# Altium PCB ADC.PcbDoc
Units mm, origin at the board's own origin, x right, y up, seen from the top; angles counter-clockwise.
Board outline 152.4 x 101.6 mm, 20 copper layers (F.Cu, F.Mask, B.Cu, B.Mask, In1.Cu, F.SilkS, In2.Cu, B.SilkS, F.Adhes, B.Adhes, F.Paste, B.Paste, Dwgs.User, Cmts.User, Eco1.User, Eco2.User, Edge.Cuts, Margin, B.CrtYd, F.CrtYd); 28 components, 48 nets, 160 pads, 53 vias.
Unrouted connection lines stored in the file: 40.
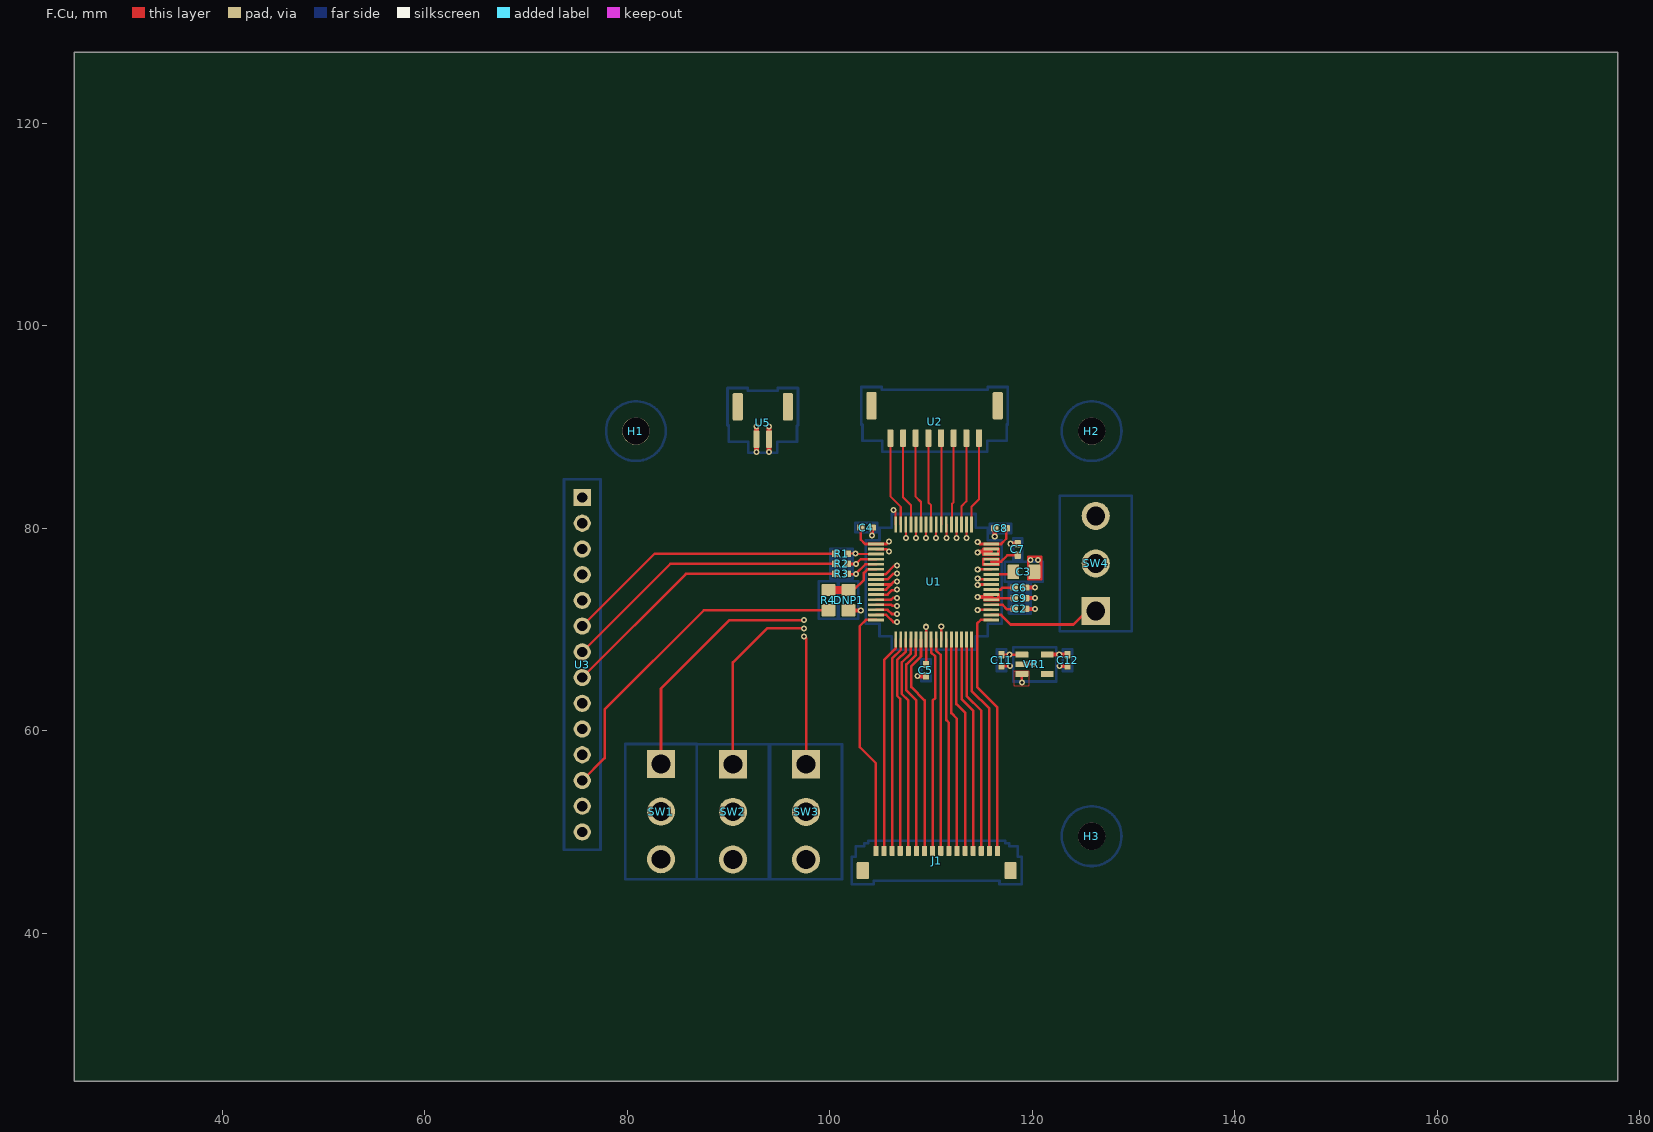
[diagram p0: F.Cu view]
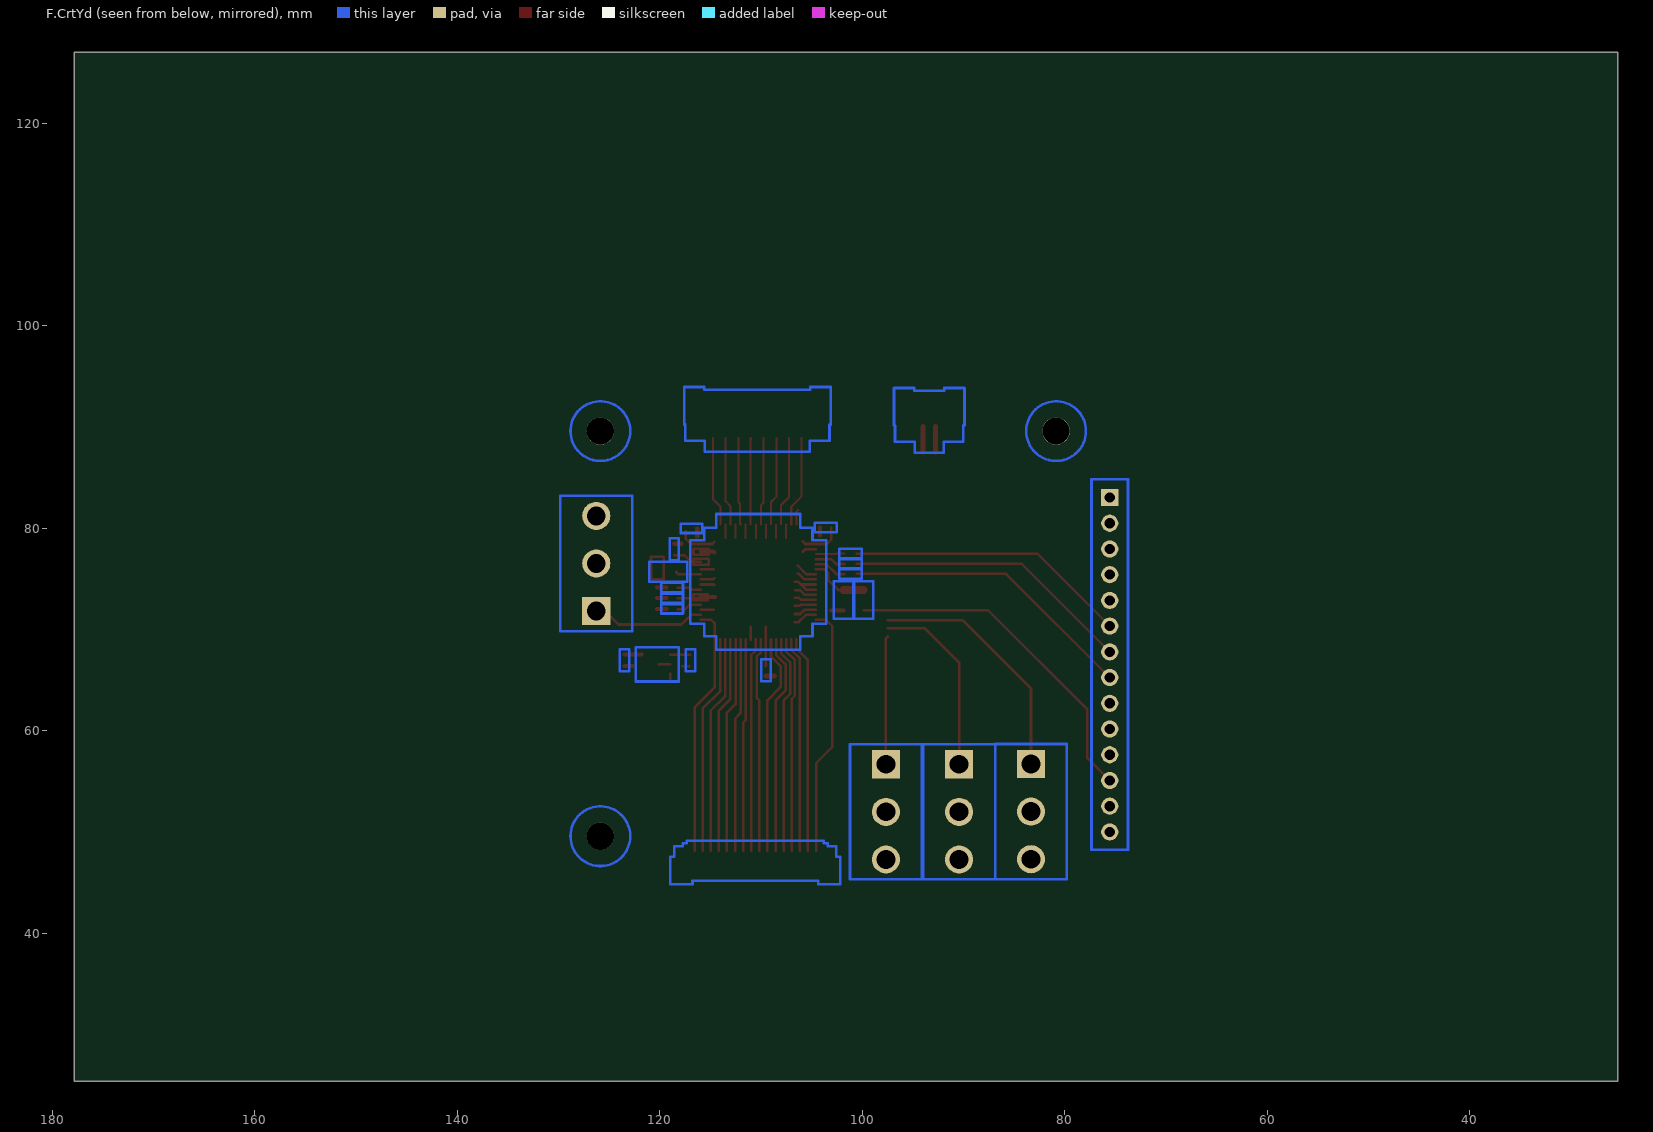
[diagram p1: F.CrtYd view, seen from below]
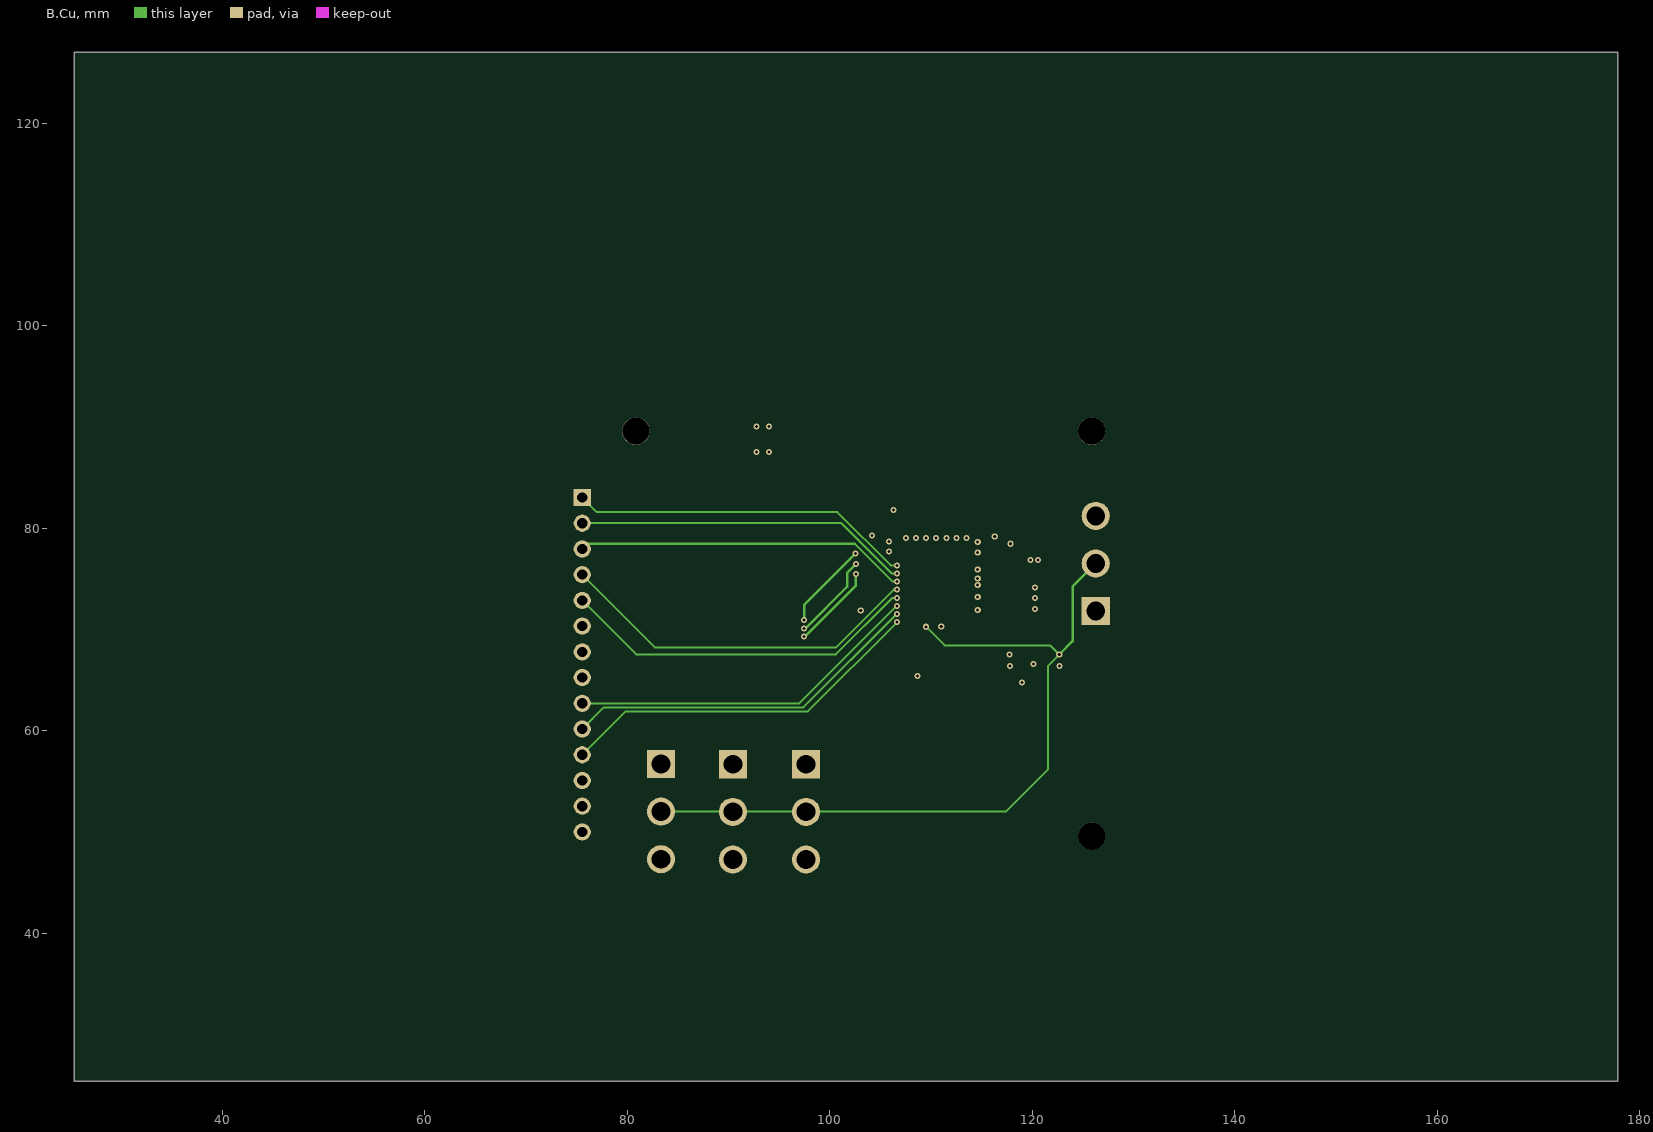
[diagram p2: B.Cu]
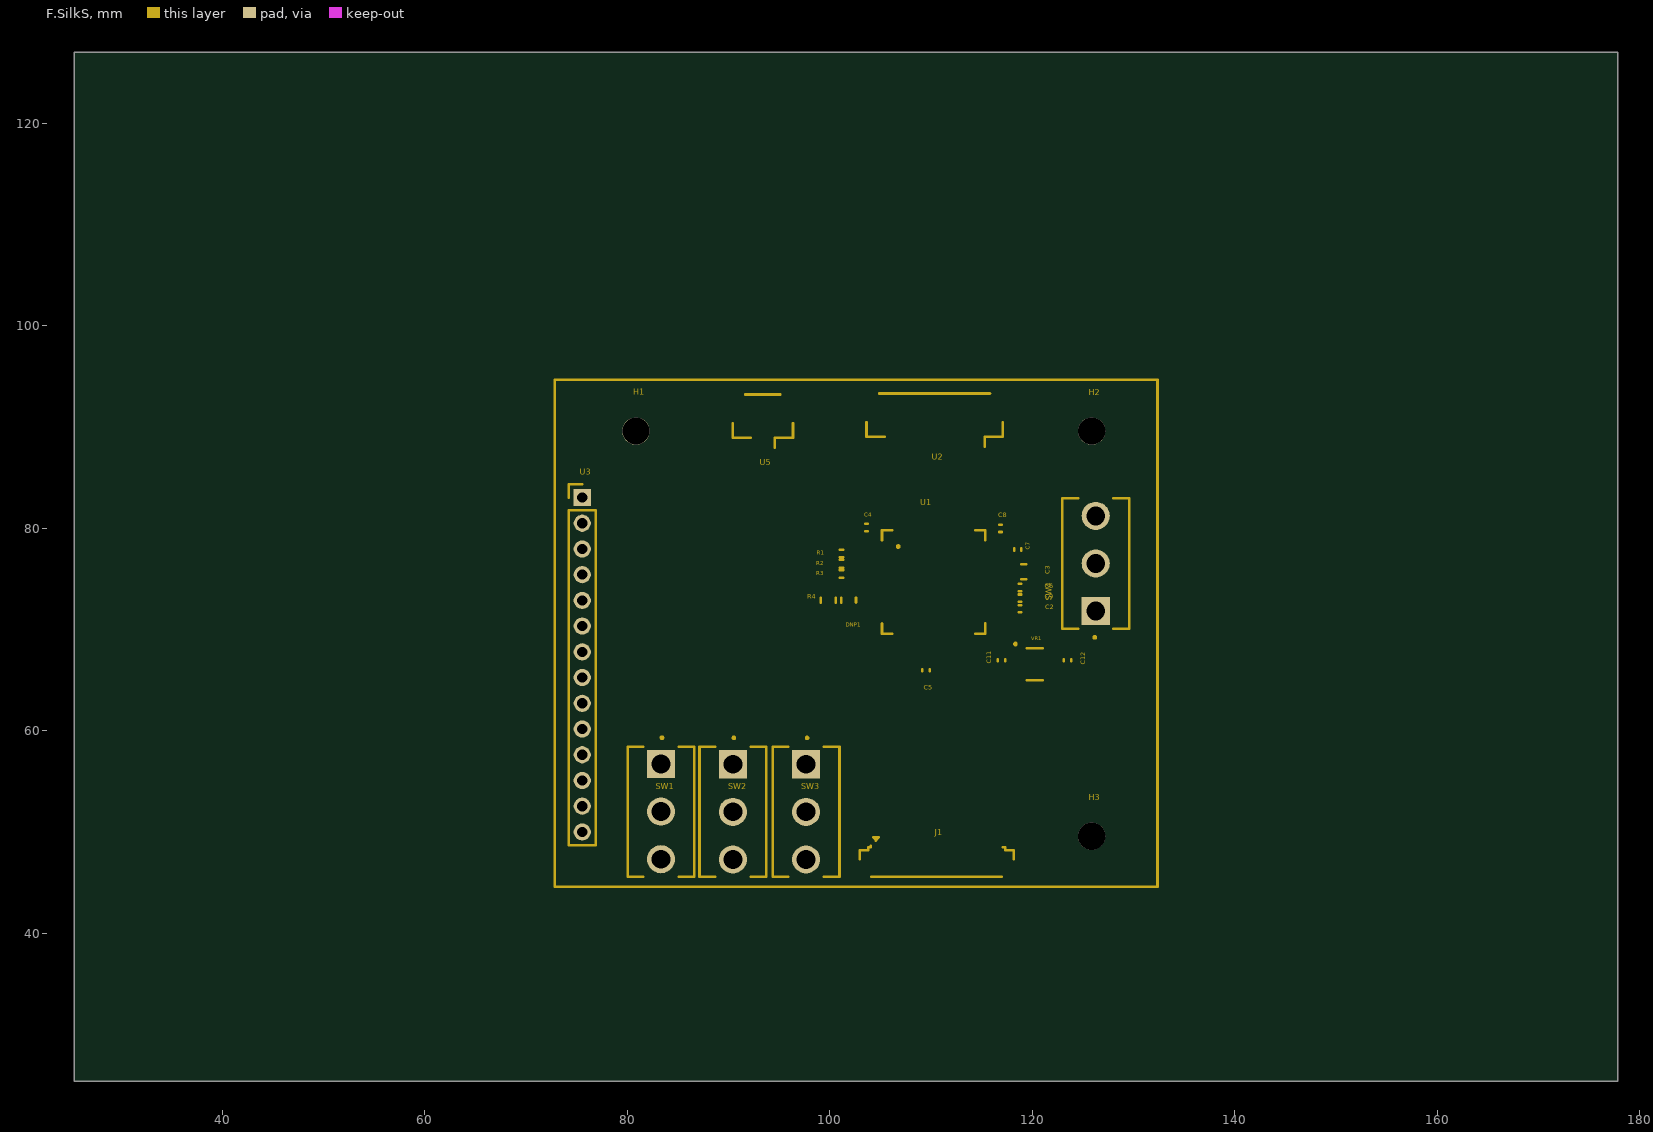
[diagram p3: F.SilkS]
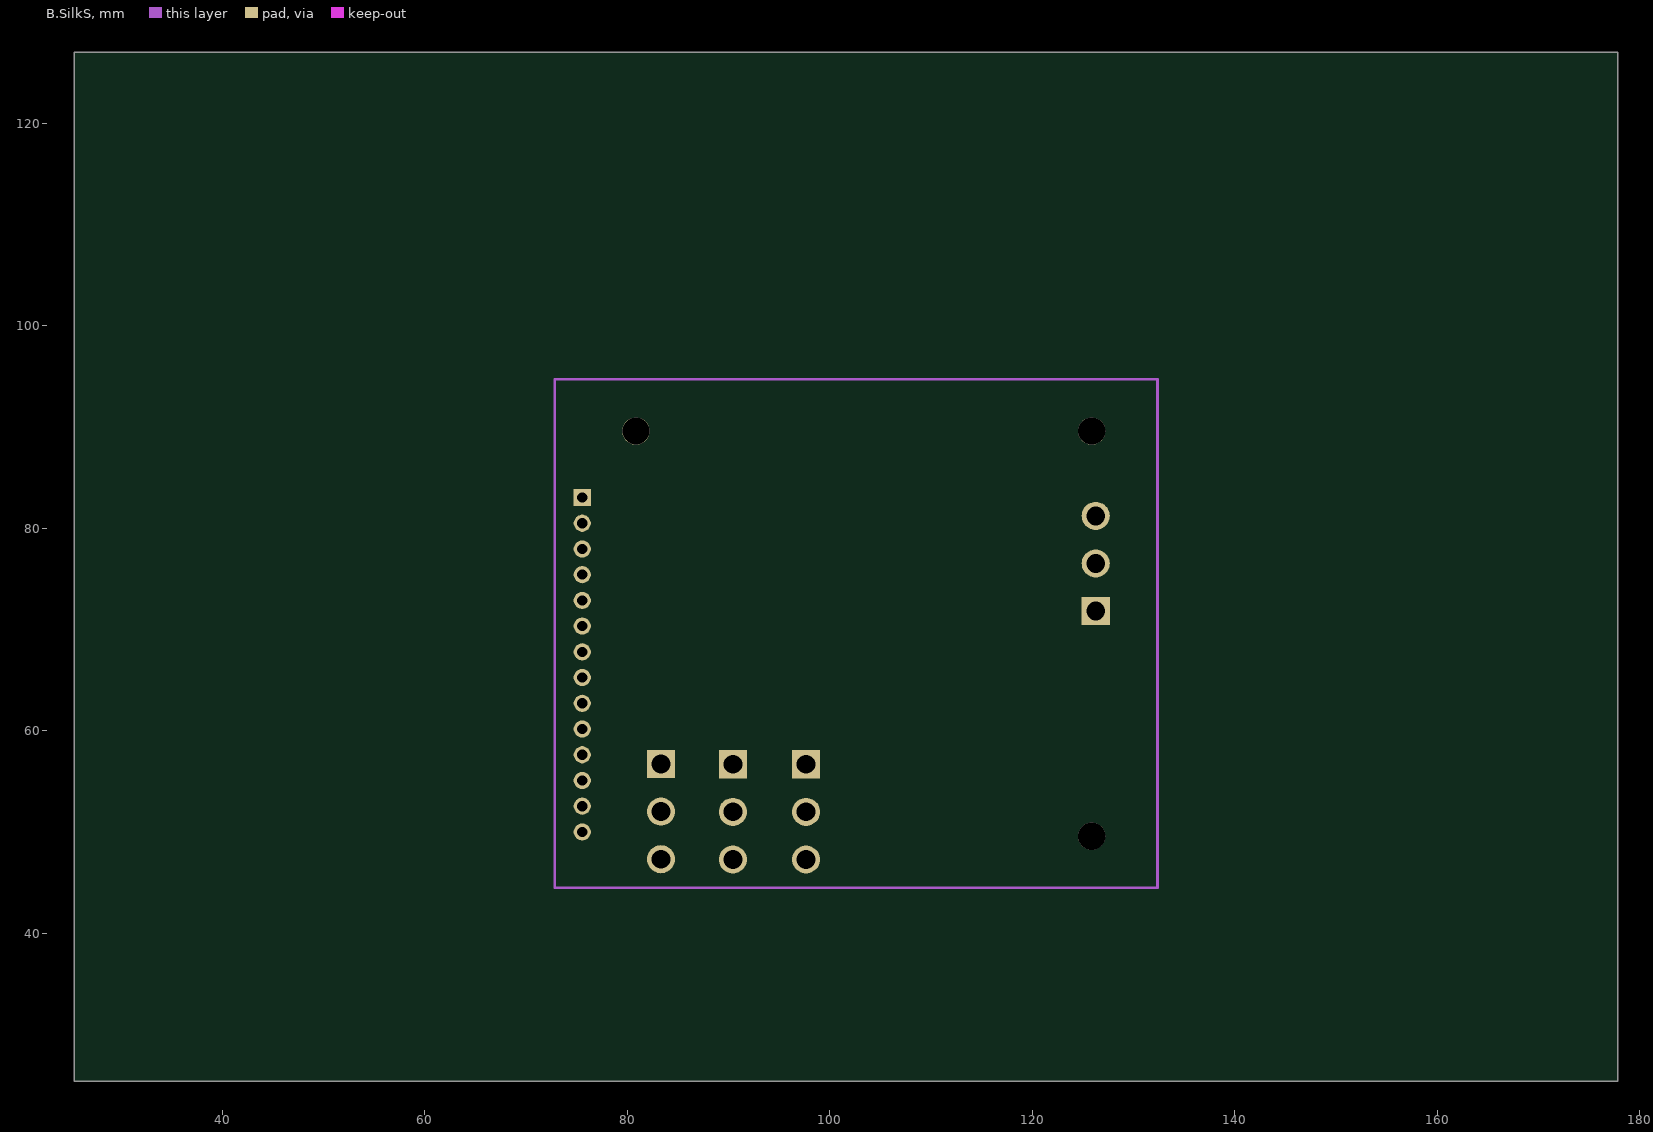
[diagram p4: B.SilkS]
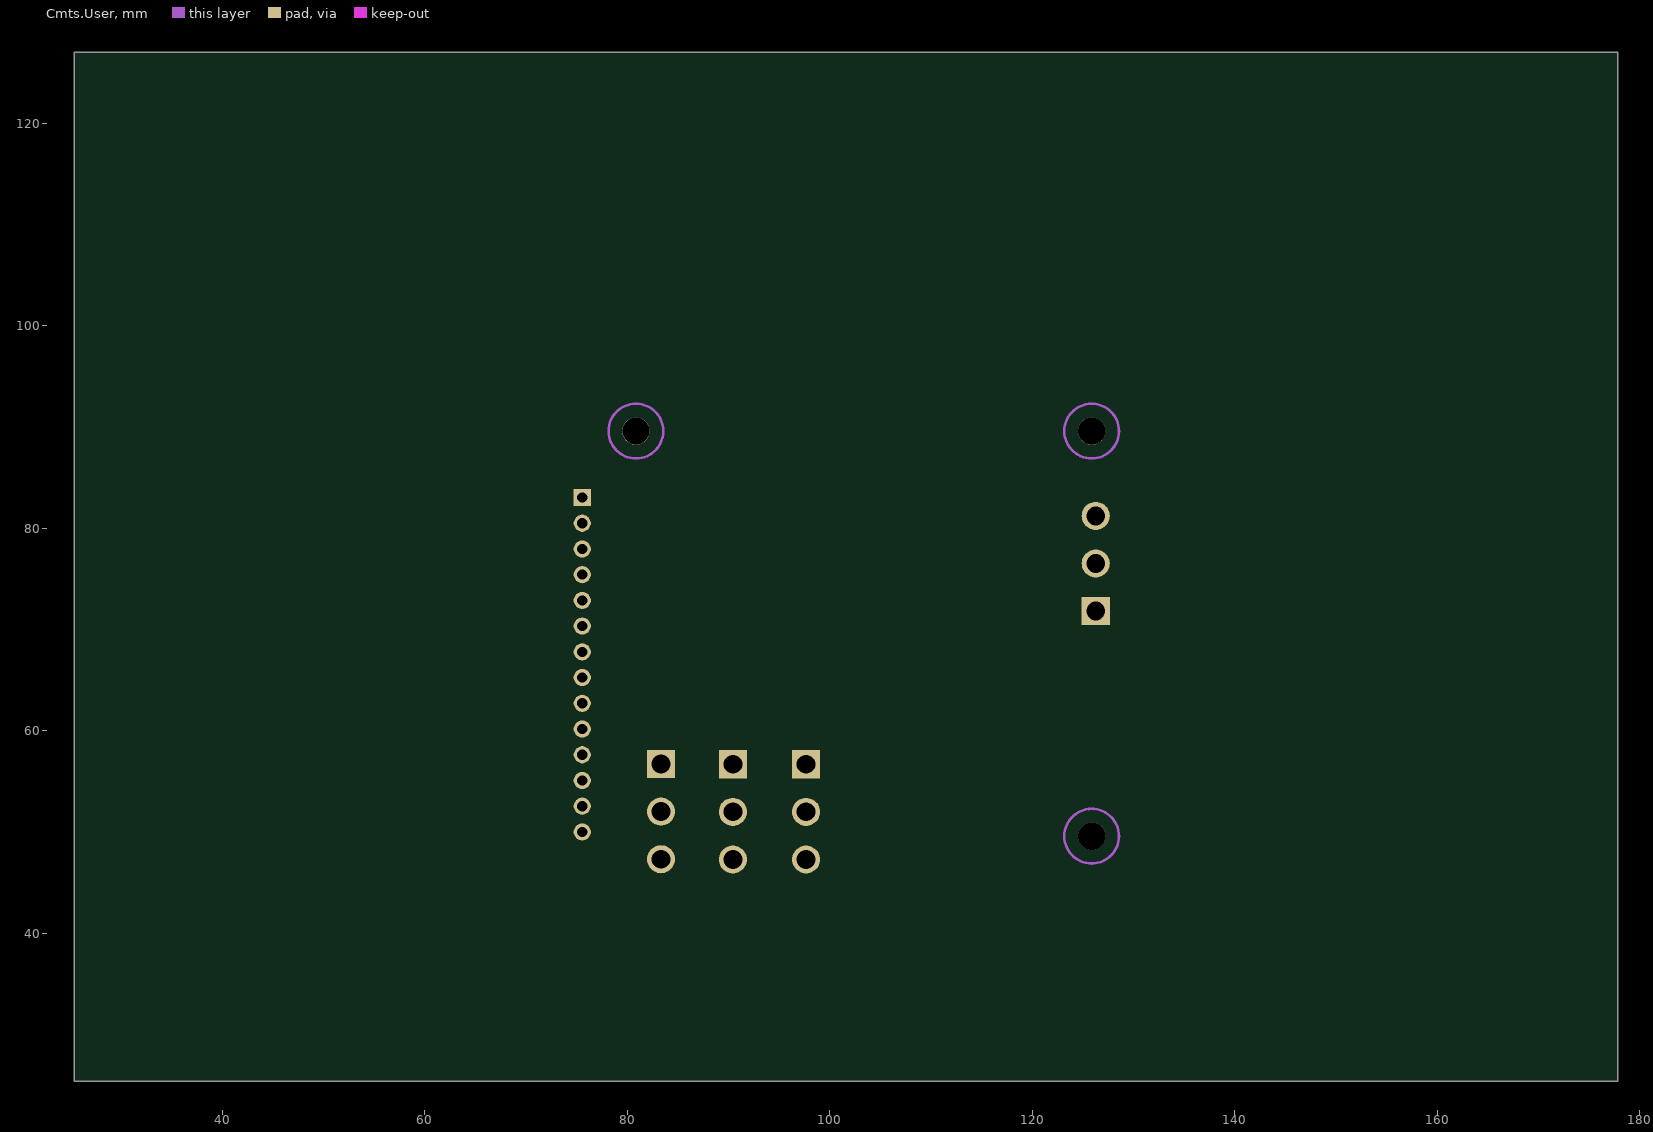
[diagram p5: Cmts.User]
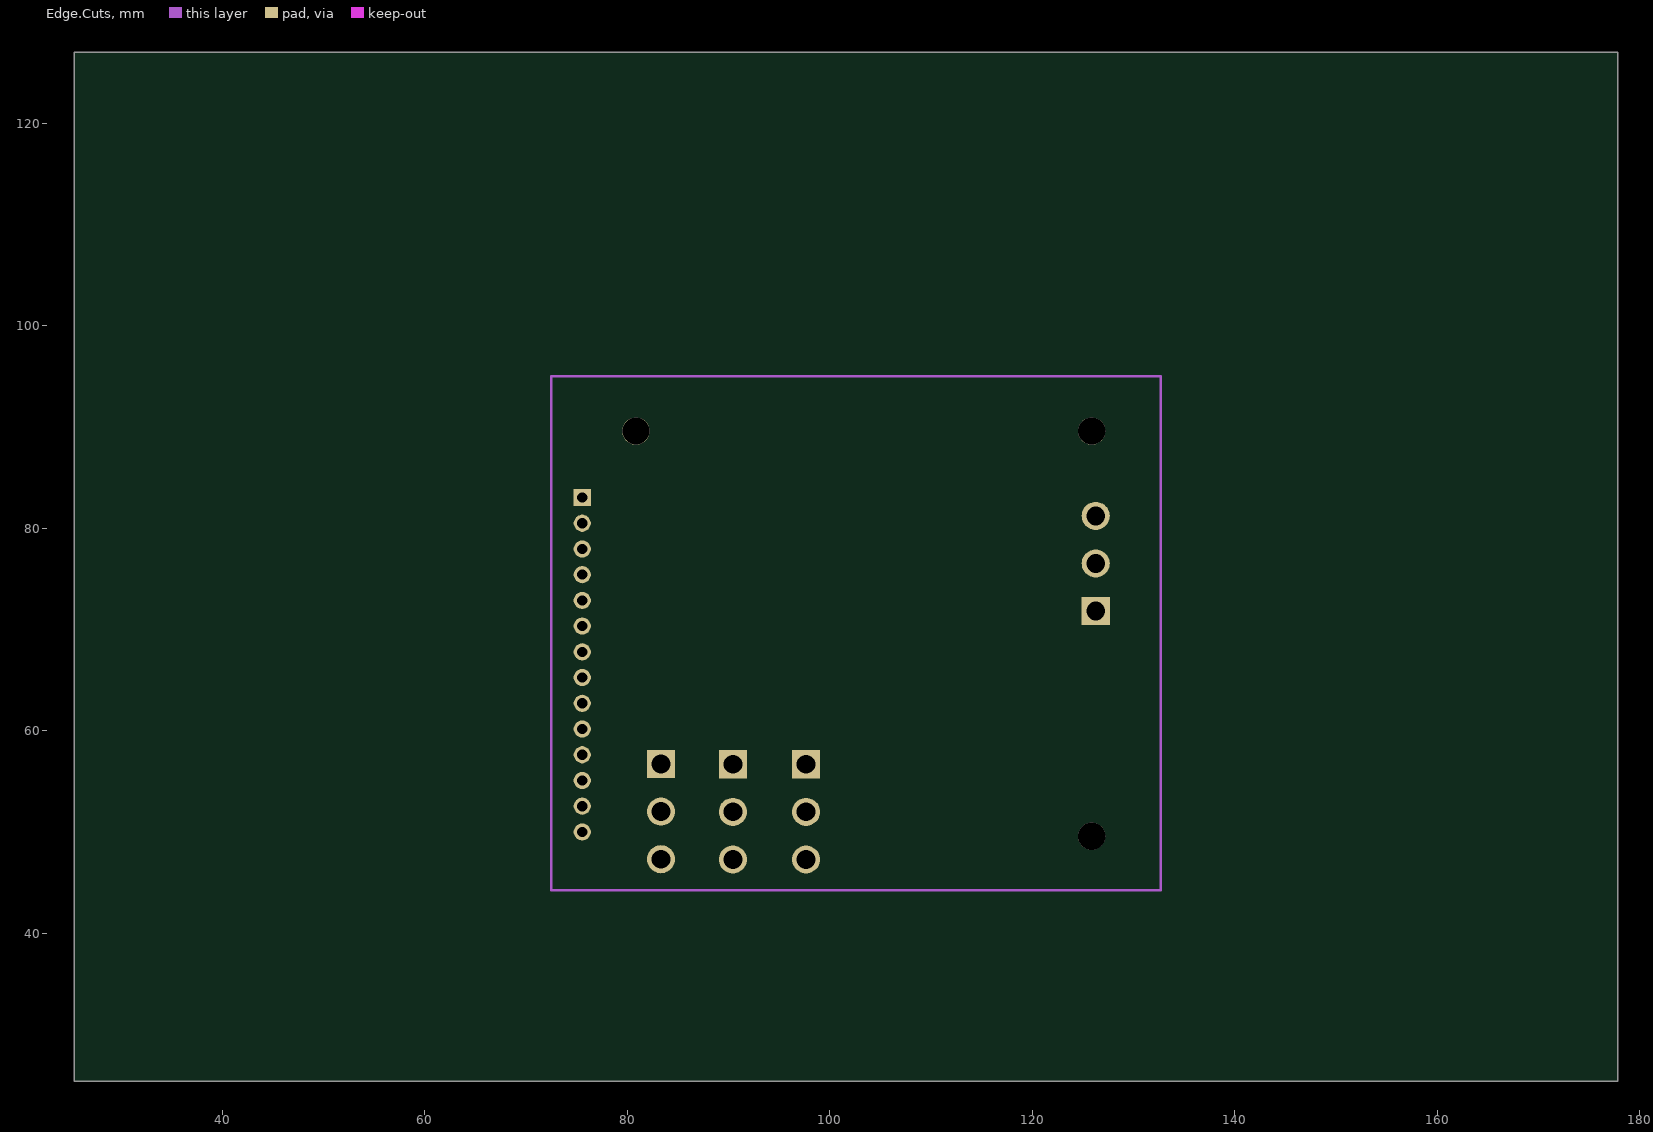
[diagram p6: Edge.Cuts]

## Layer stack, top to bottom
Top Solder: solder mask 0.0102, Solder Resist, Dk 3.5
F.Cu: signal copper 0.0356
Dielectric 1: dielectric 0.32, FR-4, Dk 4.8
F.Mask: signal copper 0.0356
Dielectric2: dielectric 0.32, FR-4, Dk 4.8
B.Cu: signal copper 0.0356
Dielectric3: dielectric 0.32, FR-4, Dk 4.8
B.Mask: signal copper 0.0356
Dielectric4: dielectric 0.32, FR-4, Dk 4.8
In1.Cu: signal copper 0.0356
Dielectric5: dielectric 0.32, FR-4, Dk 4.8
F.SilkS: signal copper 0.0356
Dielectric6: dielectric 0.32, FR-4, Dk 4.8
In2.Cu: signal copper 0.0356
Dielectric7: dielectric 0.32, FR-4, Dk 4.8
B.SilkS: signal copper 0.0356
Dielectric8: dielectric 0.32, FR-4, Dk 4.8
F.Adhes: signal copper 0.0356
Dielectric9: dielectric 0.32, FR-4, Dk 4.8
B.Adhes: signal copper 0.0356
Dielectric10: dielectric 0.32, FR-4, Dk 4.8
F.Paste: signal copper 0.0356
Dielectric11: dielectric 0.32, FR-4, Dk 4.8
B.Paste: signal copper 0.0356
Dielectric12: dielectric 0.32, FR-4, Dk 4.8
Dwgs.User: signal copper 0.0356
Dielectric13: dielectric 0.32, FR-4, Dk 4.8
Cmts.User: signal copper 0.0356
Dielectric14: dielectric 0.32, FR-4, Dk 4.8
Eco1.User: signal copper 0.0356
Dielectric15: dielectric 0.32, FR-4, Dk 4.8
Eco2.User: signal copper 0.0356
Dielectric16: dielectric 0.32, FR-4, Dk 4.8
Edge.Cuts: signal copper 0.0356
Dielectric17: dielectric 0.32, FR-4, Dk 4.8
Margin: signal copper 0.0356
Dielectric18: dielectric 0.32, FR-4, Dk 4.8
B.CrtYd: signal copper 0.0356
Dielectric19: dielectric 0.32, FR-4, Dk 4.8
F.CrtYd: signal copper 0.0356
Bottom Solder: solder mask 0.0102, Solder Resist, Dk 3.5

## Board outline
25.4,25.4 177.8,25.4 177.8,127 25.4,127

## Design rules (kind name [scope] priority, off if disabled: settings)
Clearance "Clearence 0.5_Polygon" [InNamedPolygon('In1.Cu-GND') OR InNamedPolygon('In2.Cu-+5V')] p1: gap=0.5 ignorepadtopadclearanceinfootprint=FALSE
MinimumSolderMaskSliver [All] p1: minsoldermaskwidth=0
PolygonConnect Polygon_In2.Cu-+5V_ConnectDirect [IsNamedPolygon('In2.Cu-+5V') vs IsVia] p1: connectstyle=Direct reliefconductorwidth=0.254 reliefentries=4 polygonreliefangle="90 Angle" airgapwidth=0.254
PolygonConnect Polygon_In2.Cu-+5V_ConnectRelief45 [IsNamedPolygon('In2.Cu-+5V') vs (IsThruPin or IsSMTPin) and (PadShape_AllLayers = 'Round')] p2: connectstyle=Relief reliefconductorwidth=0.5 reliefentries=4 polygonreliefangle="45 Angle" airgapwidth=0.5
PolygonConnect Polygon_In2.Cu-+5V_ConnectRelief90 [IsNamedPolygon('In2.Cu-+5V') vs (IsThruPin or IsSMTPin) and (PadShape_AllLayers <> 'Round')] p3: connectstyle=Relief reliefconductorwidth=0.5 reliefentries=4 polygonreliefangle="90 Angle" airgapwidth=0.5
PolygonConnect Polygon_In1.Cu-GND_ConnectDirect [IsNamedPolygon('In1.Cu-GND') vs IsVia] p4: connectstyle=Direct reliefconductorwidth=0.254 reliefentries=4 polygonreliefangle="90 Angle" airgapwidth=0.254
PolygonConnect Polygon_In1.Cu-GND_ConnectRelief45 [IsNamedPolygon('In1.Cu-GND') vs (IsThruPin or IsSMTPin) and (PadShape_AllLayers = 'Round')] p5: connectstyle=Relief reliefconductorwidth=0.5 reliefentries=4 polygonreliefangle="45 Angle" airgapwidth=0.5
PolygonConnect Polygon_In1.Cu-GND_ConnectRelief90 [IsNamedPolygon('In1.Cu-GND') vs (IsThruPin or IsSMTPin) and (PadShape_AllLayers <> 'Round')] p6: connectstyle=Relief reliefconductorwidth=0.5 reliefentries=4 polygonreliefangle="90 Angle" airgapwidth=0.5
RoutingVias [All] p1: holewidth=0.711 width=1.27 viastyle="Through Hole" minholewidth=0.711 minwidth=1.27 maxholewidth=0.711 maxwidth=1.27
SilkToSilkClearance [All] p1: silktosilkclearance=0
SilkToSolderMaskClearance [IsPad] p1: minsilkscreentomaskgap=0 clearancetoexposedcopper=TRUE
SolderMaskExpansion [All] p1: expansion=0.102 istentingtop=FALSE
Width [All] p1: maxlimit=10 minlimit=0.254 preferedwidth=0.254 midlayer1_maxwidth=0.254 midlayer3_maxwidth=0.254 midlayer9_maxwidth=0.254 midlayer11_maxwidth=0.254 midlayer13_maxwidth=0.254 midlayer15_maxwidth=0.254 midlayer17_maxwidth=0.254 midlayer21_maxwidth=0.254 midlayer23_maxwidth=0.254 midlayer27_maxwidth=0.254 midlayer29_maxwidth=0.254 minimp=50.000000 maximp=50.000000 favimp=50.000000
27 further rules are at their usual default settings.

## Components (designator, comment, footprint, x,y, rotation, side; value= is the part's Value field where it differs from the comment)
C2 "Comment" C_0402_1005Metric_Pad0.74x0.62mm_HandSolder 118.774,72.049 r180 top value=1uF
C3 "Comment" C_0805_2012Metric_Pad1.18x1.45mm_HandSolder 119.157,75.699 r180 top value=10uF
C4 "Comment" C_0402_1005Metric_Pad0.74x0.62mm_HandSolder 103.614,80.074 r180 top value=0.1uF
C5 "Comment" C_0402_1005Metric_Pad0.74x0.62mm_HandSolder 109.49,65.981 r90 top value=0.1uF
C6 "Comment" C_0402_1005Metric_Pad0.74x0.62mm_HandSolder 118.774,74.149 r180 top value=1uF
C7 "Comment" C_0402_1005Metric_Pad0.74x0.62mm_HandSolder 118.557,77.906 r90 top value=1uF
C8 "Comment" C_0402_1005Metric_Pad0.74x0.62mm_HandSolder 116.857,79.993 r0 top value=0.1uF
C9 "Comment" C_0402_1005Metric_Pad0.74x0.62mm_HandSolder 118.774,73.099 r180 top value=0.1uF
C11 "Comment" C_0402_1005Metric_Pad0.74x0.62mm_HandSolder 116.957,66.966 r270 top value=1uF
C12 "Comment" C_0402_1005Metric_Pad0.74x0.62mm_HandSolder 123.479,66.966 r270 top value=1uF
DNP1 "Comment" R_0805_2012Metric_Pad1.20x1.40mm_HandSolder 101.852,72.899 r270 top value=10-47k
H1 "Comment" MountingHole_2.7mm_M2.5 80.857,89.599 r0 top value=MountingHole
H2 "Comment" MountingHole_2.7mm_M2.5 125.857,89.599 r0 top value=MountingHole
H3 "Comment" MountingHole_2.7mm_M2.5 125.857,49.599 r0 top value=MountingHole
J1 "Comment" JST_SUR_SM16B-SURS-TF_1x16-1MP_P0.80mm_Horizontal 110.557,46.999 r0 top value=H_16_2.54mm
R1 "Comment" R_0402_1005Metric_Pad0.72x0.64mm_HandSolder 101.157,77.499 r0 top value=1k
R2 "Comment" R_0402_1005Metric_Pad0.72x0.64mm_HandSolder 101.157,76.499 r0 top value=1k
R3 "Comment" R_0402_1005Metric_Pad0.72x0.64mm_HandSolder 101.157,75.499 r0 top value=1k
R4 "Comment" R_0805_2012Metric_Pad1.20x1.40mm_HandSolder 99.862,72.899 r90 top value=1k
SW1 "Comment" switch1 83.332,52.024 r270 top value=SW_Reed_SPDT
SW2 "Comment" switch1 90.432,51.999 r270 top value=SW_Reed_SPDT
SW3 "Comment" switch1 97.657,51.999 r270 top value=SW_Reed_SPDT
SW4 "Comment" switch1 126.257,76.524 r90 top value=SW_Reed_SPDT
U1 "Comment" AD7606BSTZ 110.257,74.699 r0 top value=AD7606BSTZ
U2 "Comment" JST_GH_SM08B-GHS-TB_1x08-1MP_P1.25mm_Horizontal 110.357,90.749 r180 top value=~
U3 "Comment" PinHeader_1x14_P2.54mm_Vertical 75.557,83.039 r0 top value=~
U5 "Comment" JST_GH_SM02B-GHS-TB_1x02-1MP_P1.25mm_Horizontal 93.382,90.649 r180 top value=~
VR1 "Comment" TLV70033DDCR 120.232,66.574 r0 top value=TLV70033DDCR

## Footprints (in the part's own frame and the unit in brackets; to place one, negate y for a bottom-side part, rotate by r counter-clockwise, add the part's x,y. Pads: shape width x height; smd on the part's side, far side on the other; paste and mask are expansions set on the pad)
AD7606BSTZ [mm]
  rrect8% 1.56x0.28 smd paste-1.56 mask-1.56: 1(-5.68,3.75) 2(-5.68,3.25) 3(-5.68,2.75) 4(-5.68,2.25) 5(-5.68,1.75) 6(-5.68,1.25) 7(-5.68,0.75) 8(-5.68,0.25) 9(-5.68,-0.25) 10(-5.68,-0.75) 11(-5.68,-1.25) 12(-5.68,-1.75) 13(-5.68,-2.25) 14(-5.68,-2.75) 15(-5.68,-3.25) 16(-5.68,-3.75) 33(5.68,-3.75) 34(5.68,-3.25) 35(5.68,-2.75) 36(5.68,-2.25) 37(5.68,-1.75) 38(5.68,-1.25) 39(5.68,-0.75) 40(5.68,-0.25) 41(5.68,0.25) 42(5.68,0.75) 43(5.68,1.25) 44(5.68,1.75) 45(5.68,2.25) 46(5.68,2.75) 47(5.68,3.25) 48(5.68,3.75)
  rrect8% 0.28x1.56 smd paste-1.56 mask-1.56: 17(-3.75,-5.68) 18(-3.25,-5.68) 19(-2.75,-5.68) 20(-2.25,-5.68) 21(-1.75,-5.68) 22(-1.25,-5.68) 23(-0.75,-5.68) 24(-0.25,-5.68) 25(0.25,-5.68) 26(0.75,-5.68) 27(1.25,-5.68) 28(1.75,-5.68) 29(2.25,-5.68) 30(2.75,-5.68) 31(3.25,-5.68) 32(3.75,-5.68) 49(3.75,5.68) 50(3.25,5.68) 51(2.75,5.68) 52(2.25,5.68) 53(1.75,5.68) 54(1.25,5.68) 55(0.75,5.68) 56(0.25,5.68) 57(-0.25,5.68) 58(-0.75,5.68) 59(-1.25,5.68) 60(-1.75,5.68) 61(-2.25,5.68) 62(-2.75,5.68) 63(-3.25,5.68) 64(-3.75,5.68)
  F.SilkS circle w0.254: c-3.5,3.5 r0.1
  F.SilkS lines w0.254: -5.1,-4.1 -5.1,-5.1 -4.1,-5.1 ; -5.1,4.1 -5.1,5.1 -4.1,5.1 ; 4.1,-5.1 5.1,-5.1 5.1,-4.1 ; 4.1,5.1 5.1,5.1 5.1,4.1
  F.CrtYd lines w0.254: -6.71,-4.14 -6.71,4.14 -5.35,4.14 -5.35,5.35 -4.14,5.35 -4.14,6.71 4.14,6.71 4.14,5.35 5.35,5.35 5.35,4.14 6.71,4.14 6.71,-4.14 5.35,-4.14 5.35,-5.35 4.14,-5.35 4.14,-6.71 -4.14,-6.71 -4.14,-5.35 -5.35,-5.35 -5.35,-4.14 -6.71,-4.14
C_0402_1005Metric_Pad0.74x0.62mm_HandSolder [mm]
  rrect25% 0.735x0.62 smd paste-0.735 mask-0.735: 1(-0.567,0) 2(0.567,0)
  F.SilkS lines w0.254: 0.116,0.36 -0.116,0.36 ; 0.116,-0.36 -0.116,-0.36
  F.CrtYd lines w0.254: 1.08,0.46 -1.08,0.46 -1.08,-0.46 1.08,-0.46 1.08,0.46
C_0805_2012Metric_Pad1.18x1.45mm_HandSolder [mm]
  rrect21% 1.175x1.45 smd paste-1.45 mask-1.45: 1(-1.038,0) 2(1.038,0)
  F.SilkS lines w0.254: 0.261,0.735 -0.261,0.735 ; 0.261,-0.735 -0.261,-0.735
  F.CrtYd lines w0.254: 1.88,0.98 -1.88,0.98 -1.88,-0.98 1.88,-0.98 1.88,0.98
JST_GH_SM02B-GHS-TB_1x02-1MP_P1.25mm_Horizontal [mm]
  rrect25% 0.6x1.7 smd paste-1.7 mask-1.7: 1(-0.625,1.85) 2(0.625,1.85)
  rrect25% 1x2.7 smd paste-2.7 mask-2.7: MP(-2.475,-1.35) MP(2.475,-1.35)
  F.SilkS lines w0.254: 2.985,0.26 2.985,1.71 1.185,1.71 ; 1.715,-2.56 -1.715,-2.56 ; -1.185,2.7 -1.185,1.71 -2.985,1.71 -2.985,0.26
  F.CrtYd lines w0.254: 3.48,0.5 3.48,-3.2 1.47,-3.2 1.47,-2.95 -1.47,-2.95 -1.47,-3.2 -3.48,-3.2 -3.48,0.5 -3.38,0.5 -3.38,2.1 -1.43,2.1 -1.43,3.2 1.43,3.2 1.43,2.1 3.38,2.1 3.38,0.5 3.48,0.5
JST_GH_SM08B-GHS-TB_1x08-1MP_P1.25mm_Horizontal [mm]
  rrect25% 0.6x1.7 smd paste-1.7 mask-1.7: 1(-4.375,1.85) 2(-3.125,1.85) 3(-1.875,1.85) 4(-0.625,1.85) 5(0.625,1.85) 6(1.875,1.85) 7(3.125,1.85) 8(4.375,1.85)
  rrect25% 1x2.7 smd paste-2.7 mask-2.7: MP(-6.225,-1.35) MP(6.225,-1.35)
  F.SilkS lines w0.254: 6.735,0.26 6.735,1.71 4.935,1.71 ; 5.465,-2.56 -5.465,-2.56 ; -4.935,2.7 -4.935,1.71 -6.735,1.71 -6.735,0.26
  F.CrtYd lines w0.254: 7.23,0.5 7.23,-3.2 5.22,-3.2 5.22,-2.95 -5.22,-2.95 -5.22,-3.2 -7.23,-3.2 -7.23,0.5 -7.13,0.5 -7.13,2.1 -5.18,2.1 -5.18,3.2 5.18,3.2 5.18,2.1 7.13,2.1 7.13,0.5 7.23,0.5
JST_SUR_SM16B-SURS-TF_1x16-1MP_P0.80mm_Horizontal [mm]
  rrect25% 0.5x1 smd paste-1 mask-1: 1(-6,1.15) 2(-5.2,1.15) 3(-4.4,1.15) 4(-3.6,1.15) 5(-2.8,1.15) 6(-2,1.15) 7(-1.2,1.15) 8(-0.4,1.15) 9(0.4,1.15) 10(1.2,1.15) 11(2,1.15) 12(2.8,1.15) 13(3.6,1.15) 14(4.4,1.15) 15(5.2,1.15) 16(6,1.15)
  rrect21% 1.2x1.7 smd paste-1.7 mask-1.7: MP(-7.3,-0.8) MP(7.3,-0.8)
  F.SilkS lines w0.254: -7.61,0.31 -7.61,1.21 -6.76,1.21 -6.76,1.51 -6.51,1.51 -6.51,1.65 ; -6.44,-1.41 6.44,-1.41 ; 6.51,1.51 6.76,1.51 6.76,1.21 7.61,1.21 7.61,0.31 ; -6.25,2.504 -5.75,2.504 -6,2.15 -6.25,2.504
  F.CrtYd lines w0.254: -8.4,-2.15 -8.4,0.55 -8,0.55 -8,1.6 -7.15,1.6 -7.15,1.9 -6.75,1.9 -6.75,2.15 6.75,2.15 6.75,1.9 7.15,1.9 7.15,1.6 8,1.6 8,0.55 8.4,0.55 8.4,-2.15 6.2,-2.15 6.2,-1.8 -6.2,-1.8 -6.2,-2.15 -8.4,-2.15
MountingHole_2.7mm_M2.5 [mm]
  round 2.7 hole 2.7 paste-2539.97 mask-2.7: Un1(0,0)
  Cmts.User circle w0.254: c0,0 r2.7
  F.CrtYd circle w0.254: c0,0 r2.95
PinHeader_1x14_P2.54mm_Vertical [mm]
  rect 1.7x1.7 hole 1 paste-2539.97 mask-1.7: 1(0,0)
  rrect100% 1.7x1.7 hole 1 paste-2539.97 mask-1.7: 2(0,-2.54) 3(0,-5.08) 4(0,-7.62) 5(0,-10.16) 6(0,-12.7) 7(0,-15.24) 8(0,-17.78) 9(0,-20.32) 10(0,-22.86) 11(0,-25.4) 12(0,-27.94) 13(0,-30.48) 14(0,-33.02)
  F.SilkS lines w0.254: -1.33,0 -1.33,1.33 0,1.33 ; -1.33,-34.35 1.33,-34.35 1.33,-1.27 -1.33,-1.27 -1.33,-34.35
  F.CrtYd lines w0.254: -1.8,-34.8 1.8,-34.8 1.8,1.8 -1.8,1.8 -1.8,-34.8
R_0402_1005Metric_Pad0.72x0.64mm_HandSolder [mm]
  rrect25% 0.715x0.64 smd paste-0.715 mask-0.715: 1(-0.597,0) 2(0.597,0)
  F.SilkS lines w0.254: -0.168,-0.38 0.168,-0.38 ; -0.168,0.38 0.168,0.38
  F.CrtYd lines w0.254: -1.1,-0.47 1.1,-0.47 1.1,0.47 -1.1,0.47 -1.1,-0.47
R_0805_2012Metric_Pad1.20x1.40mm_HandSolder [mm]
  rrect21% 1.2x1.4 smd paste-1.4 mask-1.4: 1(-1,0) 2(1,0)
  F.SilkS lines w0.254: 0.227,-0.735 -0.227,-0.735 ; 0.227,0.735 -0.227,0.735
  F.CrtYd lines w0.254: 1.85,-0.95 1.85,0.95 -1.85,0.95 -1.85,-0.95 1.85,-0.95
switch1 [mm]
  rect 2.775x2.775 hole 1.85 paste-2539.97 mask-2.775: 1(-4.7,0)
  round 2.775 hole 1.85 paste-2539.97 mask-2.775: 2(0,0) 3(4.7,0)
  F.SilkS circle w0.254: c-7.3,0.1 r0.1
  F.SilkS lines w0.254: 6.425,-1.75 6.425,-3.3 -6.425,-3.3 -6.425,-1.75 ; 6.425,1.75 6.425,3.3 -6.425,3.3 -6.425,1.75
  F.CrtYd lines w0.254: 6.675,-3.55 6.675,3.55 -6.675,3.55 -6.675,-3.55 6.675,-3.55
TLV70033DDCR [mm]
  rrect12% 1.25x0.59 smd paste-1.25 mask-1.25: 1(-1.255,0.95) 2(-1.255,0) 3(-1.255,-0.95) 4(1.255,-0.95) 5(1.255,0.95)
  F.SilkS circle w0.254: c-1.9,2 r0.1
  F.SilkS lines w0.254: -0.8,-1.565 0.8,-1.565 ; -0.8,1.565 0.8,1.565
  F.CrtYd lines w0.254: -2.13,-1.7 2.13,-1.7 2.13,1.7 -2.13,1.7 -2.13,-1.7

## Part data
C2 C5 C6 C8 C9 C11 C12: library part C_0402_1005Metric_Pad0.74x0.62mm_HandSolder, "Capacitor SMD 0402 (1005 Metric), square (rectangular) end terminal, IPC_7351 nominal with elongated pad for handsoldering. (Body size source: IPC-SM-782 page 76, https://www.pcb-3d.com/wordpress/wp-content/uploads/ipc-sm-782a_amendment_1_and_2.pdf), generated with kicad-footprint-generator", Datasheet=~, Description="Unpolarized capacitor", ki_fp_filters=C_*
  C2 C6 C11 C12: Website=https://eu.mouser.com/ProductDetail/Murata-Electronics/GRM155Z71A105KE01D?qs=%252B6g0mu59x7LZ5VDL%2FTet%2Fg%3D%3D
  C5 C8 C9: Website=https://www.mouser.bg/ProductDetail/Murata-Electronics/GRM155R71H104KE14D?qs=2UZY3JfgLCy9gG9icKV9Yg%3D%3D
C3: library part C_0805_2012Metric_Pad1.18x1.45mm_HandSolder, "Capacitor SMD 0805 (2012 Metric), square (rectangular) end terminal, IPC_7351 nominal with elongated pad for handsoldering. (Body size source: IPC-SM-782 page 76, https://www.pcb-3d.com/wordpress/wp-content/uploads/ipc-sm-782a_amendment_1_and_2.pdf, https://docs.google.com/spreadsheets/d/1BsfQQcO9C6DZCsRaXUlFlo91Tg2WpOkGARC1WS5S8t0/edit?usp=sharing), generated with kicad-footprint-generator", Datasheet=~, Description="Unpolarized capacitor", Website=https://www.mouser.bg/ProductDetail/Murata-Electronics/GRM21BZ71E106KE15L?qs=Ey7%2FXF42M3fdXe9bIpCO9w%3D%3D, ki_fp_filters=C_*
C4 C7: library part C_0402_1005Metric_Pad0.74x0.62mm_HandSolder, "Capacitor SMD 0402 (1005 Metric), square (rectangular) end terminal, IPC-7351 nominal with elongated pad for handsoldering. (Body size source: IPC-SM-782 page 76, https://www.pcb-3d.com/wordpress/wp-content/uploads/ipc-sm-782a_amendment_1_and_2.pdf), generated with kicad-footprint-generator", Datasheet=~, Description="Unpolarized capacitor", ki_fp_filters=C_*
  C4: Website=https://www.mouser.bg/ProductDetail/Murata-Electronics/GRM155R71H104KE14D?qs=2UZY3JfgLCy9gG9icKV9Yg%3D%3D
  C7: Website=https://eu.mouser.com/ProductDetail/Murata-Electronics/GRM155Z71A105KE01D?qs=%252B6g0mu59x7LZ5VDL%2FTet%2Fg%3D%3D
DNP1 R4: library part R_0805_2012Metric_Pad1.20x1.40mm_HandSolder, "Resistor SMD 0805 (2012 Metric), square (rectangular) end terminal, IPC_7351 nominal with elongated pad for handsoldering. (Body size source: IPC-SM-782 page 72, https://www.pcb-3d.com/wordpress/wp-content/uploads/ipc-sm-782a_amendment_1_and_2.pdf), generated with kicad-footprint-generator", Datasheet=~, Description=Resistor, ki_fp_filters=R_*
  R4: Website=https://www.digikey.bg/en/products/detail/yageo/RC0805FR-071KL/727444
H1 H2 H3: library part MountingHole_2.7mm_M2.5, "Mounting Hole 2.7mm, M2.5, no annular, generated by kicad-footprint-generator mountinghole.py", Datasheet=~, Description="Mounting Hole without connection", ki_fp_filters=MountingHole*
J1: library part JST_SUR_SM16B-SURS-TF_1x16-1MP_P0.80mm_Horizontal, "JST SUR series connector, SM16B-SURS-TF (http://www.jst-mfg.com/product/pdf/eng/eSUR.pdf), generated with kicad-footprint-generator", Package=None, MANUFACTURER=Samtec, MF=Samtec, Description_1="\n                        \n                            MTSW - Samtec 2.54mm Variable Post Height Header  22 Lead Style\n                        \n", Price=None, Check_prices=https://www.snapeda.com/parts/MTSW-150-22-S-D-415/Samtec/view-part/?ref=eda, STANDARD="Manufacturer Recommendations", PARTREV=R, SnapEDA_Link=https://www.snapeda.com/parts/MTSW-150-22-S-D-415/Samtec/view-part/?ref=snap, MP=MTSW-150-22-S-D-415, Availability="In Stock"
R1 R2 R3: library part R_0402_1005Metric_Pad0.72x0.64mm_HandSolder, "Resistor SMD 0402 (1005 Metric), square (rectangular) end terminal, IPC_7351 nominal with elongated pad for handsoldering. (Body size source: IPC-SM-782 page 72, https://www.pcb-3d.com/wordpress/wp-content/uploads/ipc-sm-782a_amendment_1_and_2.pdf), generated with kicad-footprint-generator", Datasheet=~, Description=Resistor, Website=https://www.digikey.bg/en/products/detail/yageo/RC0805FR-071KL/727444, ki_fp_filters=R_*
SW1 SW2 SW3 SW4: library part switch1, Datasheet=~, Description="SPDT reed switch", Website=https://www.digikey.bg/en/products/detail/e-switch/500SSP1S1M2REA/378941
U1: library part AD7606BSTZ, SNAPEDA_PACKAGE_ID=6381, Package="LQFP -64 Analog Devices", MANUFACTURER="Analog Devices Inc.", MF="Analog Devices", Price=None, Check_prices=https://www.snapeda.com/parts/AD7606BSTZ/Analog+Devices/view-part/?ref=eda, SnapEDA_Link=https://www.snapeda.com/parts/AD7606BSTZ/Analog+Devices/view-part/?ref=snap, MP=AD7606BSTZ, Description_1="\n                        \n                            8-Channel DAS with 16-Bit, Bipolar Input, Simultaneous Sampling ADC\n                        \n", Availability="In Stock"
U2: library part JST_GH_SM08B-GHS-TB_1x08-1MP_P1.25mm_Horizontal, "JST GH series connector, SM08B-GHS-TB (http://www.jst-mfg.com/product/pdf/eng/eGH.pdf), generated with kicad-footprint-generator"
U3: library part PinHeader_1x14_P2.54mm_Vertical, "Through hole straight pin header, 1x14, 2.54mm pitch, single row"
U5: library part JST_GH_SM02B-GHS-TB_1x02-1MP_P1.25mm_Horizontal, "JST GH series connector, SM02B-GHS-TB (http://www.jst-mfg.com/product/pdf/eng/eGH.pdf), generated with kicad-footprint-generator"
VR1: library part TLV70033DDCR, Package="SOT-23-THN-5 Texas Instruments", MF="Texas Instruments", Description_1="\n                        \n                            200-mA, high-PSRR, low-IQ, low-dropout voltage regulator with enable\n                        \n", Price=None, SnapEDA_Link=https://www.snapeda.com/parts/TLV70033DDCR/Texas+Instruments/view-part/?ref=snap, MP=TLV70033DDCR, Availability="In Stock", Check_prices=https://www.snapeda.com/parts/TLV70033DDCR/Texas+Instruments/view-part/?ref=eda

## Via types
v1: diameter 0.6, hole 0.3, F.Cu to B.Cu, tented both sides, 53 vias

## Nets (pads, with @x,y where several pads share a name; then routed paths per layer and width w, separated by ;. In a path a pad name is that pad's centre, name@x,y a point inside that pad or via, vN(x,y) a via of type N, cw(c..) or ccw(c..) an arc to the next point about the centre after c; other vN are vias at no path point)
+3.3V: C5.2 C12.1 SW1.2 SW2.2 SW3.2 SW4.2 U1.23 VR1.5 | length 86.3
  F.Cu w0.25: C5.2 109.507,66.565 U1.23 v1(109.507,70.274) ; C5.2@109.507,66.391 C5.2@109.517,66.401
  F.Cu w0.4: VR1.5@121.804,67.534 C12.1
  B.Cu w0.2: SW1.2 117.382,52.024 121.557,56.199 121.557,66.424 122.657,67.524 v1(122.657,67.534) 121.742,68.449 111.332,68.449 v1(109.507,70.274)
  B.Cu w0.25: v1(122.657,67.534) 123.982,68.859 123.982,74.249 ; 123.982,69.874 123.982,71.724 123.982,74.249 ; SW4.2 123.982,74.249
+5V: C4.2 C8.2 C9.2 C11.1 U1.1 U1.37 U1.38 U1.48 U3.13 U5.1 VR1.1 VR1.3 | length 17.2
  F.Cu w0.2: 115.957,73.199 116.057,73.099
  F.Cu w0.25: C4.2 103.064,80.056 103.064,78.866 103.482,78.449 U1.1 105.607,78.449 v1(105.857,78.699) ; v1(114.607,78.649) 114.807,78.449 U1.48 116.907,78.449 117.424,78.966 C8.2@117.424,79.699 ; 116.057,73.099 C9.2 ; C11.1 116.967,67.524 VR1.1 ; v1@118.977,64.779 VR1.3
  F.Cu w0.4: v1@114.557,73.199 115.957,73.199
  F.Cu w0.5: v1(94.007,87.524) v1(94.007,90.049)
  other v1: 118.987,64.769 117.757,67.524 114.607,73.199
BUSY: U1.14 U3.10 | length 38.1
  F.Cu w0.25: U1.14 105.708,71.949 106.121,71.536 v1(106.657,71.536)
  B.Cu w0.2: U3.10 77.697,62.319 97.39,62.319 106.608,71.536 v1(106.657,71.536)
CONVST: U1.9 U1.10 U3.3 | length 37
  F.Cu w0.25: U1.10 105.557,73.949 106.257,74.649 ; U1.9 106.057,74.449 106.257,74.649 ; v1(106.657,74.736) 106.344,74.736 106.257,74.649
  B.Cu w0.2: U3.3 76.072,78.474 102.482,78.474 106.219,74.736 v1(106.657,74.736)
CS: U1.13 U3.9 | length 37.2
  F.Cu w0.25: U1.13 106.057,72.449 106.169,72.336 v1(106.657,72.336)
  B.Cu w0.2: U3.9 96.991,62.719 106.608,72.336 v1(106.657,72.336)
DB0: J1.1 U1.16 | length 24.7
  F.Cu w0.25: J1.1 104.557,56.799 102.957,58.399 102.957,70.349 103.557,70.949 U1.16
DB1: J1.2 U1.17 | length 21.3
  F.Cu w0.25: J1.2 105.357,66.999 106.507,68.149 U1.17
DB2: J1.3 U1.18 | length 21.2
  F.Cu w0.25: J1.3 106.157,67.149 107.007,67.999 U1.18
DB3: J1.4 U1.19 | length 21.3
  F.Cu w0.25: J1.4 106.957,63.161 106.655,63.463 106.655,66.997 107.507,67.849 U1.19
DB4: J1.5 U1.20 | length 21.5
  F.Cu w0.25: J1.5 107.757,62.999 107.106,63.65 107.106,66.748 108.007,67.649 U1.20
DB5: J1.6 U1.21 | length 21.7
  F.Cu w0.25: U1.21 108.507,67.499 107.557,66.549 107.557,63.999 108.557,62.999 J1.6
DB6: J1.7 U1.22 | length 21.8
  F.Cu w0.25: U1.22 109.007,67.349 108.047,66.389 108.047,64.309 109.357,62.999 J1.7
DB7{slash}DOUTA: J1.8 U1.24 | length 21.1
  F.Cu w0.25: U1.24 110.007,67.749 110.417,67.339 110.417,63.259 110.157,62.999 J1.8
DB8DOUTB: J1.9 U1.25 | length 21.1
  F.Cu w0.25: U1.25 110.507,67.949 110.957,67.499 J1.9
DB9: J1.10 U1.27 | length 21
  F.Cu w0.25: U1.27 111.507,61.049 111.757,60.799 J1.10
DB10: J1.11 U1.28 | length 21.1
  F.Cu w0.25: U1.28 112.007,61.745 112.557,61.195 J1.11
DB11: J1.12 U1.29 | length 21.2
  F.Cu w0.25: U1.29 112.507,62.649 113.357,61.799 J1.12
DB12: J1.13 U1.30 | length 21.3
  F.Cu w0.25: U1.30 113.007,63.149 114.157,61.999 J1.13
DB13: J1.14 U1.31 | length 21.5
  F.Cu w0.25: U1.31 113.507,63.449 114.957,61.999 J1.14
DB14: J1.15 U1.32 | length 21.6
  F.Cu w0.25: U1.32 114.007,63.949 115.757,62.199 J1.15
DB15: J1.16 U1.33 | length 24.8
  F.Cu w0.25: U1.33 114.907,70.949 114.557,70.599 114.557,64.324 116.557,62.324 J1.16
FRSTDATA: U1.15 U3.11 | length 38.9
  F.Cu w0.25: U1.15 105.572,71.449 106.284,70.737 v1(106.657,70.737)
  B.Cu w0.2: U3.11 79.837,61.919 97.839,61.919 v1(106.657,70.737)
GND: C2.1 C3.1 C4.1 C5.1 C6.1 C7.2 C8.1 C9.1 C11.2 C12.2 DNP1.2 SW1.3 SW2.3 SW3.3 SW4.3 U1.2 U1.26 U1.35 U1.40 U1.41 U1.43 U1.46 U1.47 U1.50 U1.52 U1.54 U1.56 U1.58 U1.60 U1.62 U1.64 U3.14 U5.2 VR1.2 | length 32.4
  F.Cu w0.2: v1(106.307,81.824) 106.507,81.624 U1.64 ; v1(107.507,79.049) U1.62 ; v1(108.507,79.049) U1.60 ; v1(109.507,79.049) U1.58 ; v1(110.507,79.049) U1.56 ; v1(111.507,79.049) U1.54 ; v1(112.507,79.049) U1.52 ; v1(113.507,79.049) U1.50
  F.Cu w0.25: U1.2 105.607,77.949 v1(105.857,77.699) ; U1.26 v1(111.007,70.299) ; v1(114.607,74.399) 114.657,74.449 U1.40 ; v1(114.607,75.049) 114.707,74.949 U1.41 ; v1@114.657,71.949 U1.35 ; v1@114.657,75.949 U1.43 ; C11.2@117.077,66.399 v1(117.774,66.399) ; VR1.2 118.987,66.584 v1(120.107,66.584) ; v1(122.662,66.401) v1@122.664,66.399
  F.Cu w0.4: DNP1.2 v1(103.057,71.899) ; v1(104.182,79.274) C4.1 ; v1(114.607,77.599) 114.707,77.699 115.907,77.699 ; v1(116.289,79.199) C8.1 ; v1(117.832,78.474) C7.2 ; C2.1 v1(120.257,72.049) ; C9.1 v1(120.257,73.099) ; C6.1 v1(120.257,74.149) ; v1@122.664,66.399 C12.2
  F.Cu w0.5: v1(92.757,87.524) v1(92.757,90.049) ; v1(108.673,65.414) C5.1
  other v1: 114.607,71.949 114.607,75.949 119.832,76.874 120.557,76.874
Net-(C2-Pad2): C2.2 U1.36 | length 2.5
  F.Cu w0.25: U1.36 117.057,72.449 117.507,71.999 C2.2@118.207,71.999
Net-(C6-Pad2): C6.2 U1.39 | length 2.4
  F.Cu w0.25: U1.39 116.857,73.949 117.057,74.149 C6.2
Net-(U1-OS0): R1.2 SW1.1 U1.3 | length 35.9
  F.Cu w0.2: R1.2 v1(102.532,77.499) 102.582,77.449 U1.3
  F.Cu w0.25: SW1.1 83.332,64.174 90.082,70.924 v1(97.457,70.924)
  B.Cu w0.2: v1(102.532,77.499) 102.545,77.486 v1@102.545,77.462
  B.Cu w0.25: v1(97.457,70.924) 97.457,72.424 v1(102.532,77.499)
Net-(U1-OS1): R2.2 SW2.1 U1.4 | length 30.2
  F.Cu w0.25: SW2.1 90.432,66.749 93.807,70.124 v1(97.457,70.124) ; R2.2 101.779,76.474 v1(102.582,76.474) 103.057,76.949 U1.4
  B.Cu w0.2: v1(97.457,70.124) v1@97.507,70.124 ; v1@102.582,76.375 v1(102.582,76.474)
  B.Cu w0.25: v1@97.507,70.124 97.607,70.124 101.707,74.224 101.707,75.599 v1(102.582,76.474)
Net-(U1-OS2): R3.2 SW3.1 U1.5 | length 24.7
  F.Cu w0.25: v1(97.457,69.324) 97.657,69.124 SW3.1 ; R3.2 101.779,75.474 v1(102.582,75.474) 102.582,75.524 103.507,76.449 U1.5
  B.Cu w0.2: 102.582,75.024 v1(102.582,75.474)
  B.Cu w0.25: v1(97.457,69.324) 97.542,69.324 102.582,74.363 v1(102.582,75.474)
Net-(U1-REF_SELECT): SW4.1 U1.34 | length 12.9
  F.Cu w0.2: SW4.1@125.122,70.689 SW4.1
  F.Cu w0.25: U1.34 116.907,71.449 117.857,70.499 124.057,70.499 125.382,71.824 SW4.1
Net-(U1-REFCAPA): C7.1 U1.44 U1.45 | length 2.9
  F.Cu w0.25: 115.957,76.699 116.907,76.699 117.547,77.339 C7.1
Net-(U1-SER{slash}BYTE_SEL{slash}{\P\A\R\}\)\: DNP1.1 R4.2 U1.6 | length 5.5
  F.Cu w0.25: DNP1.1@102.347,73.899 103.357,74.909 103.357,75.599 103.707,75.949 U1.6
  F.Cu w0.8: R4.2 DNP1.1
OS0: R1.1 U3.6 | length 28
  F.Cu w0.25: U3.6 82.717,77.499 R1.1
OS1: R2.1 U3.7 | length 28.6
  F.Cu w0.25: U3.7 84.257,76.499 R2.1
OS2: R3.1 U3.8 | length 29.2
  F.Cu w0.25: U3.8 85.797,75.499 R3.1
RANGE: U1.8 U3.2 | length 35.2
  F.Cu w0.25: U1.8 105.707,74.949 106.257,75.499 106.357,75.499
  B.Cu w0.2: U3.2 101.157,80.499 106.119,75.536 v1(106.657,75.536)
REFIN{slash}REFOUT: C3.2 U1.42 | length 2.5
  F.Cu w0.25: U1.42 118.119,75.449 C3.2@118.369,75.699
RST: U1.11 U3.4 | length 38.7
  F.Cu w0.25: U1.11 105.708,73.449 106.158,73.899 v1@106.619,73.899
  B.Cu w0.2: U3.4 82.752,68.224 100.582,68.224 106.294,73.936 v1(106.657,73.936)
SCLK{slash}RD: U1.12 U3.5 | length 37.8
  F.Cu w0.25: U1.12 106.057,72.949 106.244,73.136 v1(106.657,73.136)
  B.Cu w0.2: U3.5 80.887,67.549 100.607,67.549 106.194,73.136 v1(106.657,73.136)
SER{slash}BYTE_SEL{slash}PAR: R4.1 U3.12 | length 34.1
  F.Cu w0.25: U3.12 77.757,57.299 77.757,62.099 87.557,71.899 R4.1
STBY: U1.7 U3.1 | length 36
  F.Cu w0.25: U1.7 105.507,75.449 106.357,76.299
  B.Cu w0.2: U3.1 76.997,81.599 100.757,81.599 106.019,76.336 v1(106.657,76.336)
V1: U1.49 U2.1 | length 8.8
  F.Cu w0.2: U1.49 114.007,82.149 114.732,82.874 U2.1
V2: U1.51 U2.2 | length 8.7
  F.Cu w0.2: U1.51 113.007,82.174 113.482,82.649 U2.2
V3: U1.53 U2.3 | length 8.6
  F.Cu w0.2: U1.53 112.057,80.429 112.057,82.399 112.232,82.574 U2.3
V4: U1.55 U2.4 | length 8.5
  F.Cu w0.2: U2.4 111.007,88.874 U1.55
V5: U1.57 U2.5 | length 8.6
  F.Cu w0.2: U2.5 109.732,82.549 110.007,82.274 U1.57
V6: U1.59 U2.6 | length 8.7
  F.Cu w0.2: U2.6 108.482,83.124 109.007,82.599 U1.59
V7: U1.61 U2.7 | length 8.8
  F.Cu w0.2: U2.7 107.232,83.074 108.007,82.299 U1.61
V8: U1.63 U2.8 | length 8.9
  F.Cu w0.2: U2.8 105.982,83.149 107.007,82.124 U1.63
pads on no net: H1.Un1 H2.Un1 H3.Un1 J1.MP U2.MP U5.MP VR1.4
copper on no net: | length 679.8
  F.Cu w0.254: 115.157,76.399 116.657,76.399 116.657,76.999 115.157,76.999 115.157,76.399 ; 115.157,77.399 116.657,77.399 116.657,77.999 115.157,77.999 115.157,77.399 ; 115.257,72.899 116.657,72.899 116.657,73.499 115.257,73.499 115.257,72.899 ; 119.607,74.974 120.857,74.974 120.857,77.174 119.607,77.174 119.607,74.974
  F.SilkS w0.254: 72.832,44.599 132.357,44.599 132.357,94.649 72.832,94.649 72.832,44.599
  B.SilkS w0.254: 72.857,44.499 132.357,44.499 132.357,94.699 72.857,94.699 72.857,44.499
  Edge.Cuts w0.254: 72.482,44.249 132.682,44.249 132.682,94.999 72.482,94.999 72.482,44.249

## Polygon pours and split planes (outlines as drawn)
GND on In1.Cu "In1.Cu-GND" (solid, remove dead copper, pour order 0): 73.011,94.695 132.157,94.799 132.157,44.249 73.298,44.399
+5V on In2.Cu "In2.Cu-+5V" (solid, remove dead copper, pour order 1): 72.903,94.749 132.157,94.799 132.162,44.599 73.302,44.899
no net on F.Cu "NONET_L01_P002" (solid, pour order 2): 118.237,65.913 119.634,65.913 119.634,64.389 118.237,64.389